# EAGLE board MotionCircuit (EAGLE 9.7.0)

Size 253.86 x 160.71 mm. Coordinates in mm from the lower left corner, seen from the top.
Outline: 0,0 253.86,0 253.86,160.71 0,160.71 0,0
Copper layers (1*16): Top 0.035mm / dielectric 1.5mm / Bottom 0.035mm
Design rules "default": minimum track width 6mil, minimum drill 0.35mm, track to track 6mil, track to pad 6mil, pad to pad 6mil, via to via 6mil, smd to smd 6mil, copper to edge 40mil, drill to drill 6mil, minimum pad ring 10mil, minimum via ring 8mil, stop-mask expansion 4mil, vias tented up to drill 0mil, thermal gap 10mil

## Footprints (pad centres in the part's own frame; a part is rotated, then mirrored left to right if it is on the bottom)
BATTERY-GENERIC = drill 1.118 pad 3.15 octagon: + 2.54,0; - -2.54,0
LEDRD254W60D565H860B_O = drill 0.981 pad 1.581: 1 -1.27,0; 2 1.27,0
DG01D = drill 1.118 pad 3.15 octagon: + 2.54,0; - -2.54,0
28015 = drill 1.016 long: 1 -2.54,0; 2 0,0; 3 2.54,0
RESAD1016W63L850D250B = drill 0.83 pad 1.43: 1 -5.08,0; 2 5.08,0
ARDUINO-UNO-R3-SHIELD = drill 1.016 pad 1.88: 3.3V 24.13,-2.54; 5V 24.13,0; A0 24.13,12.7; A1 24.13,15.24; A2 24.13,17.78; A3 24.13,20.32; A4 24.13,22.86; A5 24.13,25.4; AREF -24.13,-13.97; D2 -24.13,20.32; D3 -24.13,17.78; D4 -24.13,15.24; D5 -24.13,12.7; D6 -24.13,10.16; D7 -24.13,7.62; D8 -24.13,3.81; D9 -24.13,1.27; D10 -24.13,-1.27; D11 -24.13,-3.81; D12 -24.13,-6.35; D13 -24.13,-8.89; GND@0 24.13,2.54; GND@1 24.13,5.08; GND@2 -24.13,-11.43; IOREF 24.13,-7.62; NC 24.13,-10.16; RES 24.13,-5.08; RX -24.13,25.4; SCL -24.13,-19.05; SDA -24.13,-16.51; TX -24.13,22.86; VIN 24.13,7.62
DIP762W53P254L1969H508Q16B = drill 0.743 pad 1.343: 1 -3.81,8.89; 2 -3.81,6.35; 3 -3.81,3.81; 4 -3.81,1.27; 5 -3.81,-1.27; 6 -3.81,-3.81; 7 -3.81,-6.35; 8 -3.81,-8.89; 9 3.81,-8.89; 10 3.81,-6.35; 11 3.81,-3.81; 12 3.81,-1.27; 13 3.81,1.27; 14 3.81,3.81; 15 3.81,6.35; 16 3.81,8.89

## Placement (x,y rotation side)
BAT1  9V  [BATTERY-GENERIC]  127.27,8.26 270 top
D1  ORANGE  [LEDRD254W60D565H860B_O]  27.18,122.33 180 top
D2  ORANGE  [LEDRD254W60D565H860B_O]  39.86,122.6 180 top
M1  MOTOR_DG01D  [DG01D]  205.35,86.42 180 top
M2  MOTOR_DG01D  [DG01D]  241.16,86.42 180 top
PING1  DISTANCE-SENSOR-3PIN  [28015]  110.6,89.75 0 top
PING2  DISTANCE-SENSOR-3PIN  [28015]  166.6,89.44 0 top
R1  220  [RESAD1016W63L850D250B]  38.59,117.52 90 top
R2  220  [RESAD1016W63L850D250B]  25.91,117.25 90 top
U1  ARDUINO-UNO-R3-SHIELD  [ARDUINO-UNO-R3-SHIELD]  47.88,77.92 270 top
U3  L293E  [DIP762W53P254L1969H508Q16B]  139.88,50.55 270 top

## Library data of the parts
BAT1 M1 M2 PING1 PING2 R1 R2 U1 U3 = Tinkercad
D1 D2 = Tinkercad; CATEGORY: Opto-Electronic; SUB-CATEGORY: LED; VALUE: LED_ORANGE

## Nets
BAT1+: BAT1.+ U3.8 U3.16
BAT1-: BAT1.- M1.- M2.- PING1.1 PING2.1 R1.1 R2.1 U1.GND@0 U1.GND@1 U1.GND@2 U3.4 U3.5 U3.12 U3.13
D1_C: D1.2 R2.2
D2_C: D2.2 R1.2
M1_+: M1.+ U3.3
M2_+: M2.+ U3.6
U1_5V: PING1.2 PING2.2 U1.5V U3.1 U3.9
U1_D2: PING1.3 U1.D2
U1_D6: PING2.3 U1.D6
U1_D9: U1.D9 U3.7
U1_D10: U1.D10 U3.2
U1_D12: D2.1 U1.D12
U1_D13: D1.1 U1.D13

## Tracks (layer width: path | path; a pad name or v marks a point on that pad's centre or on a via)
BAT1+  (2 unrouted)
BAT1-  (13 unrouted)
D1_C  (1 unrouted)
D2_C  (1 unrouted)
M1_+  (1 unrouted)
M2_+  (1 unrouted)
U1_5V  (4 unrouted)
U1_D2  (1 unrouted)
U1_D6  (1 unrouted)
U1_D9  (1 unrouted)
U1_D10  (1 unrouted)
U1_D12  (1 unrouted)
U1_D13  (1 unrouted)